# EAGLE board PulseLover (EAGLE 5.10)

Size 82.04 x 21.59 mm. Coordinates in mm from the lower left corner, seen from the top.
Outline: 66.55,4.57 66.55,2.03 64.26,2.03
Outline: 66.55,4.57 66.55,11.68
Outline: 66.55,11.68 66.55,18.03
Outline: 66.55,18.03 66.55,19.3 64.01,19.3
Outline: 64.01,19.3 61.47,19.3
Outline: 61.47,19.3 58.93,19.3
Outline: 58.93,19.3 56.39,19.3
Outline: 56.39,19.3 53.59,19.3
Outline: 51.05,19.3 48.51,19.3
Outline: 48.51,19.3 45.97,19.3
Outline: 45.97,19.3 43.43,19.3
Outline: 64.01,19.3 64.01,17.53 60.71,14.22 57.4,14.22 57.4,16.76
Outline: 61.47,19.3 61.47,17.53 60.71,16.76 58.93,16.76
Outline: 58.93,16.76 58.93,19.3
Outline: 45.97,2.03 45.97,3.05 46.48,3.56 48.51,3.56
Outline: 45.97,2.03 48.51,2.03
Outline: 53.85,2.03 51.05,2.03
Outline: 51.05,2.03 48.51,2.03
Outline: 41.15,19.3 41.15,17.27 42.67,17.27 43.43,16.51 43.43,13.21
Outline: 41.15,19.3 43.43,19.3
Outline: 43.43,13.21 44.7,13.21
Outline: 44.7,13.21 44.7,17.02 43.43,18.29 43.43,19.3
Outline: 44.7,13.21 45.97,13.21
Outline: 45.97,13.21 45.97,17.02
Outline: 48.51,17.02 47.24,17.02
Outline: 47.24,17.02 45.97,17.02
Outline: 45.97,17.02 45.97,19.3
Outline: 48.51,19.3 48.51,17.02
Outline: 51.05,19.3 51.05,17.78 49.78,16.51 49.78,13.46
Outline: 61.47,2.03 58.93,2.03
Outline: 58.93,2.03 56.13,2.03
Outline: 57.4,7.37 58.93,7.37
Outline: 53.85,2.03 53.85,3.3 54.86,4.32 54.86,7.37
Outline: 56.13,2.03 53.85,2.03
Outline: 58.93,3.56 57.4,5.08 57.4,7.37
Outline: 53.59,19.3 51.05,19.3
Outline: 53.59,16.76 53.59,19.3
Outline: 53.59,16.76 53.59,14.22 54.86,14.22
Outline: 56.39,19.3 56.39,18.03 54.86,16.51 54.86,14.22
Outline: 52.32,7.37 53.59,7.37
Outline: 53.59,7.37 54.86,7.37
Outline: 54.86,7.37 56.13,7.37
Outline: 56.13,7.37 57.4,7.37
Outline: 52.32,16.76 52.32,13.21 53.85,11.68 66.55,11.68
Outline: 53.59,7.37 53.59,5.08 53.09,4.57 52.32,4.57
Outline: 52.32,7.37 52.32,4.57
Outline: 52.32,4.57 51.05,4.57
Outline: 51.05,7.37 51.05,8.13 45.97,13.21
Outline: 51.05,7.37 51.05,4.57
Outline: 40.39,2.03 40.89,2.54 43.69,2.54
Outline: 40.39,2.03 43.69,2.03
Outline: 43.69,2.03 45.97,2.03
Outline: 57.4,16.76 56.9,16.76 56.13,16 56.13,12.95
Outline: 57.4,16.76 58.93,16.76
Outline: 48.51,17.02 48.51,14.73 49.78,13.46
Outline: 52.32,16.76 51.82,16.76 51.05,16 51.05,12.19
Outline: 52.32,16.76 53.59,16.76
Outline: 47.24,17.02 47.24,13.97 52.07,9.14 58.67,9.14 64.26,3.56 64.26,2.03
Outline: 56.13,2.03 56.13,7.37
Outline: 58.93,2.03 58.93,3.56
Outline: 51.05,4.57 50.04,4.57 49.78,4.83 49.78,7.11 48.51,8.38
Outline: 58.93,3.56 58.93,7.37
Outline: 66.55,18.03 61.47,12.95 56.13,12.95
Outline: 58.93,7.37 61.47,4.83 61.47,2.03
Outline: 66.55,4.57 65.02,4.57 59.18,10.41 52.83,10.41 51.05,12.19
Outline: 43.69,2.03 43.69,2.54
Outline: 64.26,2.03 61.47,2.03
Outline: 43.43,13.21 42.16,13.21
Outline: 37.59,16.26 41.91,16.26 42.16,16 42.16,13.21
Outline: 37.59,19.3 41.15,19.3
Outline: 56.13,12.95 54.86,14.22
Outline: 52.32,7.37 51.05,7.37
Outline: 51.05,12.19 49.78,13.46
Outline: 44.7,8.38 44.7,3.56
Outline: 43.69,2.54 44.7,3.56
Outline: 48.51,8.38 47.24,8.38
Outline: 47.24,8.38 45.97,8.38
Outline: 45.97,8.38 44.7,8.38
Outline: 47.24,8.38 47.24,4.83 45.97,4.83
Outline: 44.7,8.38 43.43,8.38
Outline: 43.43,8.38 43.43,4.32 42.93,3.81 36.32,3.81 36.32,2.03
Outline: 37.59,16.26 37.59,13.97 38.35,13.21 42.16,13.21
Outline: 37.59,16.26 37.59,19.3
Outline: 40.89,8.38 40.89,10.92 38.1,10.92
Outline: 40.89,8.38 37.59,8.38 37.59,5.08
Outline: 40.39,2.03 36.32,2.03
Outline: 42.16,8.38 42.16,5.33 41.91,5.08 37.59,5.08
Outline: 51.05,4.57 51.05,2.03
Outline: 48.51,2.03 48.51,3.56
Outline: 48.51,3.56 48.51,8.38
Outline: 43.43,8.38 42.16,8.38
Outline: 42.16,8.38 40.89,8.38
Outline: 45.97,4.83 44.7,3.56
Outline: 45.97,4.83 45.97,8.38
Outline: 38.1,10.92 37.85,10.92 36.07,9.14 33.02,9.14 33.02,5.08 37.59,5.08
Outline: 31.75,12.95 36.07,12.95 38.1,10.92
Outline: 31.75,12.95 31.75,19.3 37.59,19.3
Outline: 31.75,12.95 31.75,2.03 36.32,2.03
Outline: 15.49,12.95 15.49,9.4 17.78,7.11 21.59,7.11 23.88,9.4 23.88,12.95 21.59,15.24 17.78,15.24 15.49,12.95
Outline: 74.68,9.91 74.68,11.94 76.71,11.94 76.71,9.91 74.68,9.91
Outline: 4.57,9.91 4.57,11.94 6.6,11.94 6.6,9.91 4.57,9.91
Outline: 0,0 82.04,0 82.04,21.59 0,21.59 0,0
Copper layers (1*16): Top 0.035mm / dielectric 1.5mm / Bottom 0.035mm
Design rules "default": minimum track width 10mil, minimum drill 24mil, track to track 8mil, track to pad 8mil, pad to pad 8mil, via to via 8mil, smd to smd 8mil, copper to edge 40mil, drill to drill 8mil, minimum pad ring 10mil, minimum via ring 8mil, stop-mask expansion 4mil, vias tented up to drill 0mil, thermal gap 10mil
Milling: 28 lines

## Footprints (pad centres in the part's own frame; a part is rotated, then mirrored left to right if it is on the bottom)
HDSP-M = drill 0.813 long: 1 -5.08,-7.62; 2 -2.54,-7.62; 3 0,-7.62; 4 2.54,-7.62; 5 5.08,-7.62; 6 5.08,7.62; 7 2.54,7.62; 8 0,7.62; 9 -2.54,7.62; 10 -5.08,7.62
FE05-1 = drill 0.813 long: 1 -5.08,0; 2 -2.54,0; 3 0,0; 4 2.54,0; 5 5.08,0
SO28W = smd 0.65 x 1.7: 1 -7.62,-4.78; 2 -6.35,-4.78; 3 -5.08,-4.78; 4 -3.81,-4.78; 5 -2.54,-4.78; 6 -1.27,-4.78; 7 0,-4.78; 8 1.27,-4.78; 9 2.54,-4.78; 10 3.81,-4.78; 11 5.08,-4.78; 12 6.35,-4.78; 13 7.62,-4.78; 14 8.89,-4.78; 15 8.89,4.78; 16 7.62,4.78; 17 6.35,4.78; 18 5.08,4.78; 19 3.81,4.78; 20 2.54,4.78; 21 1.27,4.78; 22 0,4.78; 23 -1.27,4.78; 24 -2.54,4.78; 25 -3.81,4.78; 26 -5.08,4.78; 27 -6.35,4.78; 28 -7.62,4.78

## Placement (x,y rotation side)
E$4  [HDSP-M]  60.2,10.67 0 top
E$5  [HDSP-M]  47.24,10.67 0 top
E$6  [FE05-1]  39.12,12.19 90 top
E$61  [SO28W]  49.15,10.67 0 top

## Library data of the parts
E$4 E$5 = display-hp
E$6 = con-lsta
E$61 = microchip

## Text on the board
Top: * | *
Unrouted: pgc | PGD | PGC | RB5 | RB4 | RB3 | RB2 | RB1 | RB0 | VDD | VSS | RC7 | RC6 | RC5 | RC4 | pgd | vss | vdd | mclr | MCLR | RA0 | RA1 | RA2 | RA3 | RA4 | RA5 | VSS | OSC1 | OSC2 | RC0 | RC1 | RC2 | VUSB